# EAGLE board pcb6 (EAGLE 6.4)
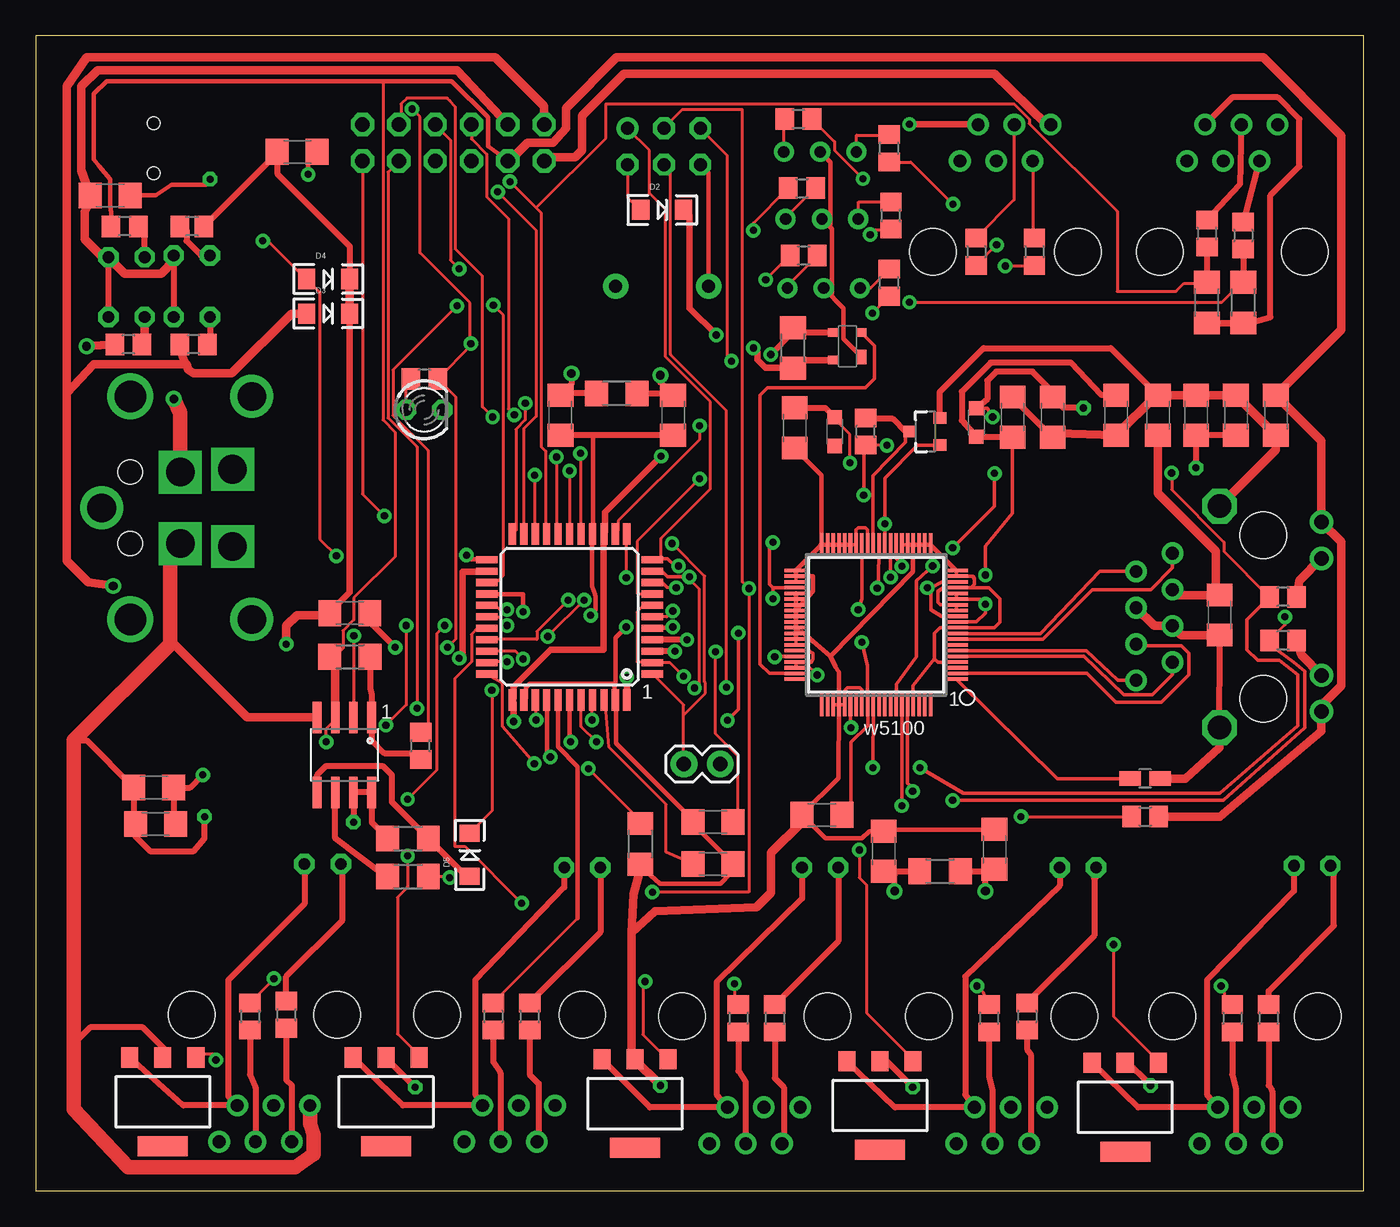
[diagram p0: board, top side]
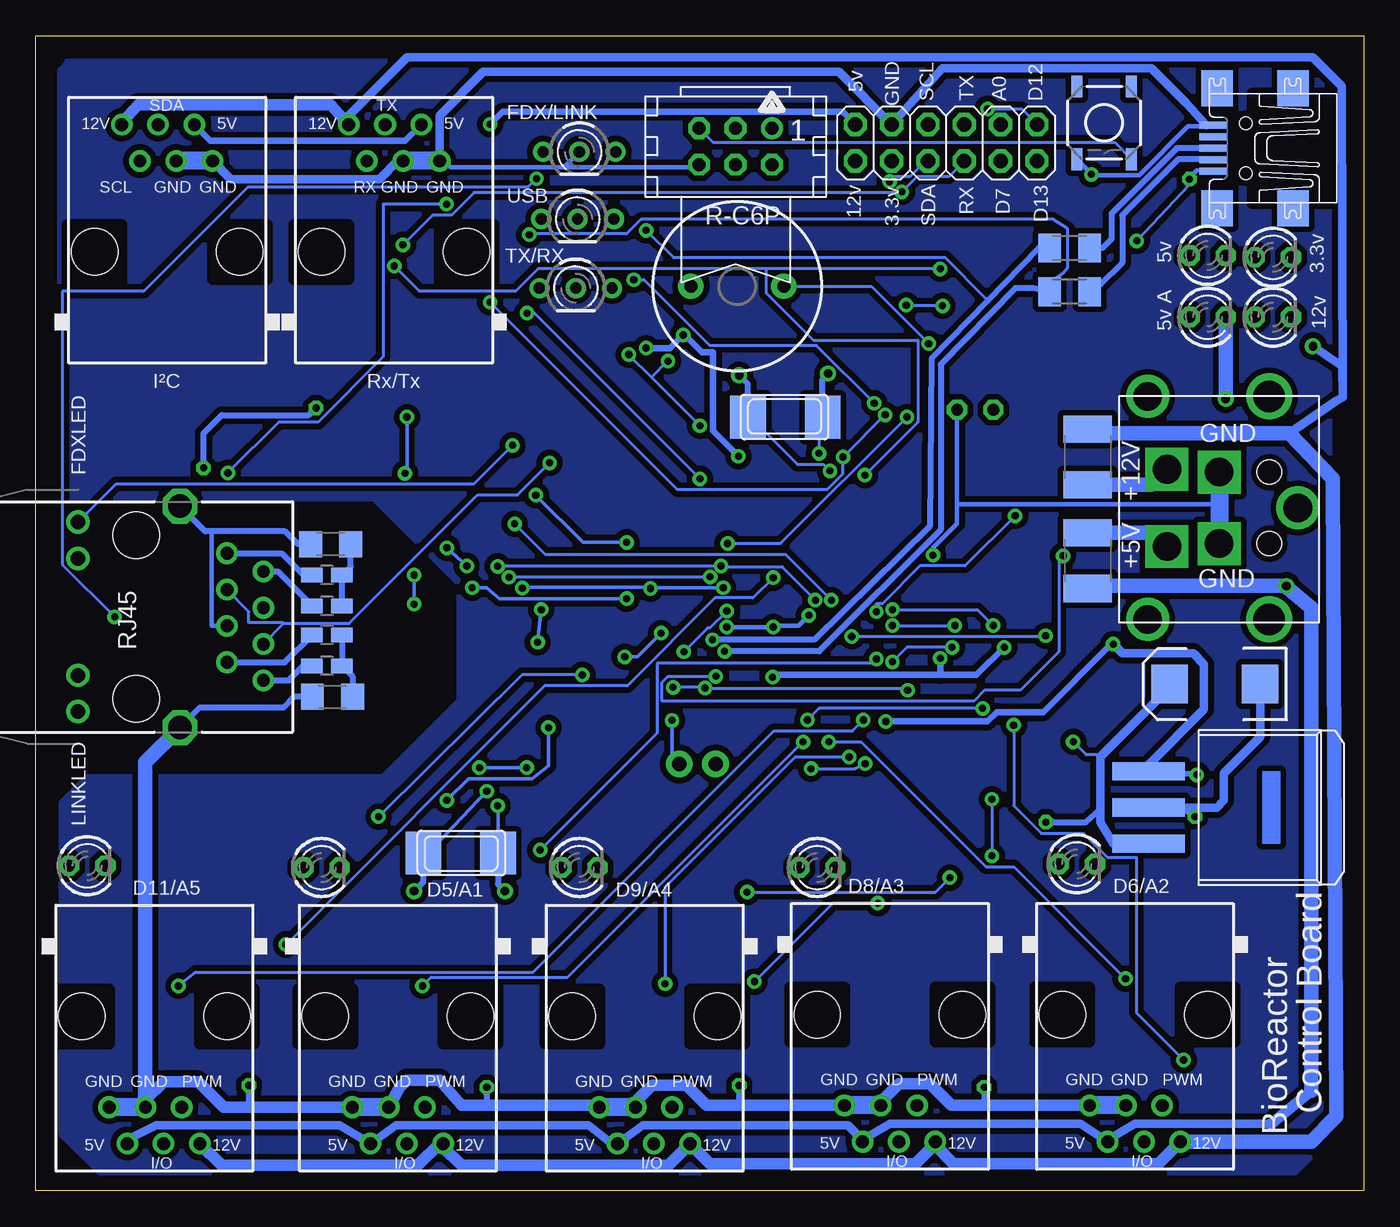
[diagram p1: board, bottom side, seen from below]

Size 92.89 x 80.76 mm. Coordinates in mm from the lower left corner, seen from the top.
Outline: 0,0 92.89,0 92.89,80.76 0,80.76 0,0
Copper layers (1*16): Top 0.035mm / dielectric 1.5mm / Bottom 0.035mm
Design rules "SparkFun": minimum track width 8mil, minimum drill 20mil, track to track 8mil, track to pad 8mil, pad to pad 8mil, via to via 8mil, smd to smd 8mil, copper to edge 10mil, drill to drill 8mil, minimum pad ring 12mil, minimum via ring 10mil, stop-mask expansion 4mil, vias tented up to drill 25mil, thermal gap 10mil
Net classes: 0 default: width 0.203 mm; 1 power: width 0.305 mm; 2 VIN: width 0.305 mm, drill 0.076 mm, clearance 0.025 mm; 3 fine: width 0.305 mm; 4 aref: width 0.254 mm, drill 0.076 mm, clearance 0.076 mm

## Footprints (pad centres in the part's own frame; a part is rotated, then mirrored left to right if it is on the bottom)
C1206 = smd 1.6 x 1.8: 1 -1.4,0; 2 1.4,0
EIA7343 = smd 2.55 x 2.7: A 3.17,0; C -3.17,0
TINYISP = drill 0.914 octagon: GND 2.54,1.27; MOSI 0,1.27; RESET 2.54,-1.27; SCK 0,-1.27; VCC -2.54,1.27 | drill 0.914: MISO -2.54,-1.27
LED-1206 = smd 1.2 x 1.4: A -1.5,0; C 1.5,0
HY931147C = drill 1.63 octagon: GND1 3.05,7.745; GND2 3.05,-7.745 | drill 0.9: P$2 6.35,4.445; P$3 8.89,3.175; P$4 6.35,1.905; P$5 8.89,0.635; P$6 6.35,-0.635; P$7 8.89,-1.905; P$8 6.35,-3.175; P$9 8.89,-4.445 | drill 1.016: P$11 -4.08,6.625; P$12 -4.08,4.085; P$13 -4.08,-4.085; P$14 -4.08,-6.625 | hole 3.25: 0,5.715; 0,-5.715
C1812 = smd 1.9 x 3.4: 1 -1.95,0; 2 1.95,0
BICOLOR-3MM = drill 0.8 pad 1.4: 1 -2.54,0; 2 0,0; 3 2.54,0
RJ12-STRAIGHT-I2C = drill 0.9 pad 1.4: +5V 1.905,8.89; +12V -3.175,8.89; GND1 3.175,6.35; GND2 0.635,6.35; SCL -1.905,6.35; SDA -0.635,8.89 | hole 3.251: -5.08,0; 5.08,0
SOT143-R = smd 1 x 0.7: 1 -0.75,-1 | smd 0.6 x 0.7: 2 0.95,-1; 3 0.95,1; 4 -0.95,1
SQFP80 = smd 1.6 x 0.25: 1 -5.6,3.8; 2 -5.6,3.4; 3 -5.6,3; 4 -5.6,2.6; 5 -5.6,2.2; 6 -5.6,1.8; 7 -5.6,1.4; 8 -5.6,1; 9 -5.6,0.6; 10 -5.6,0.2; 11 -5.6,-0.2; 12 -5.6,-0.6; 13 -5.6,-1; 14 -5.6,-1.4; 15 -5.6,-1.8; 16 -5.6,-2.2; 17 -5.6,-2.6; 18 -5.6,-3; 19 -5.6,-3.4; 20 -5.6,-3.8; 41 5.6,-3.8; 42 5.6,-3.4; 43 5.6,-3; 44 5.6,-2.6; 45 5.6,-2.2; 46 5.6,-1.8; 47 5.6,-1.4; 48 5.6,-1; 49 5.6,-0.6; 50 5.6,-0.2; 51 5.6,0.2; 52 5.6,0.6; 53 5.6,1; 54 5.6,1.4; 55 5.6,1.8; 56 5.6,2.2; 57 5.6,2.6; 58 5.6,3; 59 5.6,3.4; 60 5.6,3.8 | smd 0.25 x 1.6: 21 -3.8,-5.6; 22 -3.4,-5.6; 23 -3,-5.6; 24 -2.6,-5.6; 25 -2.2,-5.6; 26 -1.8,-5.6; 27 -1.4,-5.6; 28 -1,-5.6; 29 -0.6,-5.6; 30 -0.2,-5.6; 31 0.2,-5.6; 32 0.6,-5.6; 33 1,-5.6; 34 1.4,-5.6; 35 1.8,-5.6; 36 2.2,-5.6; 37 2.6,-5.6; 38 3,-5.6; 39 3.4,-5.6; 40 3.8,-5.6; 61 3.8,5.6; 62 3.4,5.6; 63 3,5.6; 64 2.6,5.6; 65 2.2,5.6; 66 1.8,5.6; 67 1.4,5.6; 68 1,5.6; 69 0.6,5.6; 70 0.2,5.6; 71 -0.2,5.6; 72 -0.6,5.6; 73 -1,5.6; 74 -1.4,5.6; 75 -1.8,5.6; 76 -2.2,5.6; 77 -2.6,5.6; 78 -3,5.6; 79 -3.4,5.6; 80 -3.8,5.6
DD-3 = smd 1.27 x 5.08: 1 -2.54,-7.938; 2 0,-7.938; 3 2.54,-7.938
RJ12-STRAIGHT = drill 0.9 pad 1.4: +5V 1.905,8.89; +12V -3.175,8.89; GND1 3.175,6.35; GND2 0.635,6.35; I/O -0.635,8.89; PWM -1.905,6.35 | hole 3.251: -5.08,0; 5.08,0
RJ12-STRAIGHT-RS232 = drill 0.9 pad 1.4: +5V 1.905,8.89; +12V -3.175,8.89; GND1 3.175,6.35; GND2 0.635,6.35; RX -1.905,6.35; TX -0.635,8.89 | hole 3.251: -5.08,0; 5.08,0
1X02 = drill 1.016 pad 1.88: 1 0,0; 2 2.54,0
2X06 = drill 1.016 octagon: 1 -6.35,-1.27; 2 -6.35,1.27; 3 -3.81,-1.27; 4 -3.81,1.27; 5 -1.27,-1.27; 6 -1.27,1.27; 7 1.27,-1.27; 8 1.27,1.27; 9 3.81,-1.27; 10 3.81,1.27; 11 6.35,-1.27; 12 6.35,1.27
L2012C = smd 1 x 1: 1 -1,0; 2 1,0
LED3MM = drill 0.813 octagon: A -1.27,0; K 1.27,0
PG-SOT-223 = smd 1.2 x 1.4: 1 -2.311,-3.099; 2 0,-3.099; 3 2.311,-3.099 | smd 3.5 x 1.4: 4 0,3.099
SOT23-3 = smd 0.8 x 0.9: 1 -0.95,-1; 2 0.95,-1; 3 0,1.1
R0805 = smd 1.3 x 1.5: 1 -0.95,0; 2 0.95,0
R1206 = smd 1.6 x 1.803: 1 -1.422,0; 2 1.422,0
R0805W = smd 1.5 x 1: 1 -1.052,0; 2 1.052,0
M1206 = smd 1.6 x 2: 1 -1.4,0; 2 1.4,0
TACTILE_SWITCH_SMD = smd 1.524 x 0.762: 1 -2.54,1.905; 2 2.54,1.905; 3 -2.54,-1.905; 4 2.54,-1.905
R0805@1 = smd 1.3 x 1.5: 1 -0.85,0; 2 0.85,0
BUZZER-12MM = drill 0.9 pad 1.778: + 3.25,0; - -3.25,0
TQFP44 = smd 1.5 x 0.5: 1 -5.8,4; 2 -5.8,3.2; 3 -5.8,2.4; 4 -5.8,1.6; 5 -5.8,0.8; 6 -5.8,0; 7 -5.8,-0.8; 8 -5.8,-1.6; 9 -5.8,-2.4; 10 -5.8,-3.2; 11 -5.8,-4; 23 5.8,-4; 24 5.8,-3.2; 25 5.8,-2.4; 26 5.8,-1.6; 27 5.8,-0.8; 28 5.8,0; 29 5.8,0.8; 30 5.8,1.6; 31 5.8,2.4; 32 5.8,3.2; 33 5.8,4 | smd 0.5 x 1.5: 12 -4,-5.8; 13 -3.2,-5.8; 14 -2.4,-5.8; 15 -1.6,-5.8; 16 -0.8,-5.8; 17 0,-5.8; 18 0.8,-5.8; 19 1.6,-5.8; 20 2.4,-5.8; 21 3.2,-5.8; 22 4,-5.8; 34 4,5.8; 35 3.2,5.8; 36 2.4,5.8; 37 1.6,5.8; 38 0.8,5.8; 39 0,5.8; 40 -0.8,5.8; 41 -1.6,5.8; 42 -2.4,5.8; 43 -3.2,5.8; 44 -4,5.8
SO08 = smd 0.61 x 2.21: 1 -1.905,-2.616; 2 -0.635,-2.616; 3 0.635,-2.616; 4 1.905,-2.616; 5 1.905,2.616; 6 0.635,2.616; 7 -0.635,2.616; 8 -1.905,2.616
KPJX-4S-S = drill 2 square: +5V 2.7,1.35; +12V -2.7,1.35; GND1 -2.5,5; GND2 2.5,5 | drill 2: P$1 -7.8,0; P$2 7.8,0; P$11 0,10.5 | drill 2.2: P$3 -7.8,8.5; P$4 7.8,8.5 | hole 1.7: -2.5,8.5; 2.5,8.5
NX6035 = smd 2.5 x 3: P$1 2.665,0; P$2 -2.565,0
UX60-MB-5ST = smd 2 x 0.5: 1 2.25,1.6; 2 2.25,0.8; 3 2.25,0; 4 2.25,-0.8; 5 2.25,-1.6 | smd 2.2 x 2.5: M1 -3.3,-4.2; M2 -3.3,4.2; M3 2,4.2; M4 2,-4.2 | hole 0.9: 0,-1.75; 0,1.75

## Placement (x,y rotation side)
C1  100nF  [C1206]  21.97,40.39 0 top
C2  22pF  [C1206]  36.7,54.23 90 top
C3  100nF  [C1206]  47.37,25.78 0 top
C4  100nF  [C1206]  81.15,54.23 270 top
C5  470nF  [C1206]  8.38,25.65 180 top
C6  33uF 10V  [EIA7343]  10.41,35.43 180 bottom
C7  10uF  [C1206]  5.21,69.6 0 top
C8  22pF  [C1206]  44.58,54.23 90 top
C10  10uF 20V  [C1206]  8.26,28.19 180 top
C11  100nF  [C1206]  47.37,22.86 0 top
C12  100nF  [C1206]  18.29,72.64 180 top
C14  100nF  [C1206]  78.49,54.23 90 top
C15  10uF 6.3V A TANT  [C1206]  68.33,54.1 90 top
C22  13pF  [C1206]  67.06,23.88 90 top
C23  100nF  [C1206]  72.14,34.54 180 bottom
C24  100nF  [C1206]  72.26,45.21 180 bottom
C25  100nF  [C1206]  86.74,54.23 270 top
C26  100nF  [C1206]  75.56,54.23 270 top
C31  13pF  [C1206]  59.31,23.75 90 top
C32  10uF 6.3V A TANT  [C1206]  71.12,54.1 270 top
C34  10uF 6.3V A TANT  [C1206]  53.09,53.34 270 top
C35  100nF  [C1206]  83.95,54.23 90 top
C36  100nF  [C1206]  54.99,26.29 180 top
C37  100nF  [C1206]  82.8,40.26 270 top
CON1  SPI  [TINYISP]  43.94,73.03 180 bottom
D2  1N581D1206  [LED-1206]  43.81,68.58 0 top
D3  1N581D1206  [LED-1206]  20.45,61.34 0 top
D4  1N581D1206  [LED-1206]  20.45,63.75 0 top
D5  1N581D1206  [LED-1206]  30.35,23.5 90 top
ETHERNET  none  [HY931147C]  85.85,40.13 0 bottom
F1  0.5A  [C1812]  19.3,51.31 90 bottom
F2  0.5A  [C1812]  19.3,44.07 270 bottom
FDX  BICOLOR-LED  [BICOLOR-3MM]  54.86,72.64 180 bottom
I2C_INT0  I2C  [RJ12-STRAIGHT-I2C]  83.69,65.66 0 bottom
IC1  APX811-44UG-7  [SOT143-R]  56.77,59.05 90 top
IC2  W5100SQFP80  [SQFP80]  58.79,39.57 180 top
IC3  LM3940IS-3.3F  [DD-3]  7.11,26.8 270 bottom
J1  RJ12STRAIGHT  [RJ12-STRAIGHT]  16,12.32 180 bottom
J2  RJ12STRAIGHT  [RJ12-STRAIGHT]  33.15,12.32 180 bottom
J3  RJ12STRAIGHT  [RJ12-STRAIGHT]  50.29,12.19 180 bottom
J4  RJ12STRAIGHT  [RJ12-STRAIGHT]  84.58,12.19 180 bottom
J5  RS232  [RJ12-STRAIGHT-RS232]  67.82,65.66 0 bottom
J7  RJ12STRAIGHT  [RJ12-STRAIGHT]  67.56,12.19 180 bottom
JP4  JP4  [1X02]  47.88,29.85 180 top
JP5  Extansion Port  [2X06]  29.21,73.28 0 bottom
L1  1uH 250mA 0805  [L2012C]  65.79,53.72 90 top
L2  1uH 250mA 0805  [L2012C]  55.88,53.09 90 top
LED2  Blue  [LED3MM]  72.9,22.61 0 bottom
LED3  RED  [LED3MM]  6.35,65.28 0 bottom
LED4  RED  [LED3MM]  10.92,65.41 0 bottom
LED5  Blue  [LED3MM]  20.07,22.86 0 bottom
LED6  Blue  [LED3MM]  38.23,22.61 0 bottom
LED7  BLue  [LED3MM]  54.86,22.61 0 bottom
LED8  Blue  [LED3MM]  89.28,22.73 0 bottom
LED9  RED  [LED3MM]  10.92,61.09 0 bottom
LED10  RED  [LED3MM]  6.35,61.09 0 bottom
LED14  Alert RED  [LED3MM]  27.18,54.61 0 top
Q1  BSP613P  [PG-SOT-223]  59.05,5.97 180 top
Q2  BSP613P  [PG-SOT-223]  8.89,6.22 180 top
Q3  2N7002  [SOT23-3]  62.23,53.09 90 top
Q4  BSP613P  [PG-SOT-223]  24.51,6.22 180 top
Q5  BSP613P  [PG-SOT-223]  41.91,6.1 180 top
Q6  BSP613P  [PG-SOT-223]  76.2,5.84 180 top
R  1k  [R0805]  66.67,12.06 270 top
R1  10k  [R1206]  26.04,24.64 180 top
R2  1k  [R0805]  87.25,41.53 180 top
R3  10k  [R1206]  42.29,24.26 90 top
R4  1k  [R0805]  17.53,12.32 270 top
R5  1k  [R0805]  34.54,12.19 270 top
R6  1k  [R0805]  51.69,12.06 270 top
R7  1k  [R0805]  86.23,12.06 270 top
R8  1K  [R0805]  81.92,66.93 270 top
R9  1K  [R0805]  65.79,65.66 270 top
R10  1K  [R0805]  69.85,65.66 270 top
R11  1K  [R0805]  84.45,66.8 270 top
R12  10K  [R1206]  84.45,62.1 270 top
R13  1M  [R1206]  40.64,55.75 0 top
R14  10K  [R1206]  81.92,62.1 270 top
R15  10k  [R1206]  52.96,58.93 270 top
R16  10k  [R1206]  21.97,37.34 180 top
R17  1k  [R0805]  26.92,31.12 90 top
R18  10k  [R1206]  26.04,21.97 180 top
R19  1k  [R0805]  87.25,38.48 180 top
R20  49.9 1%  [R0805W]  72.52,38.86 180 bottom
R21  49.9 1%  [R0805W]  72.52,36.7 180 bottom
R22  49.9 1%  [R0805W]  72.52,43.05 180 bottom
R23  49.9 1%  [R0805W]  72.52,40.89 180 bottom
R24  22  [M1206]  20.57,65.91 0 bottom
R25  1k  [R0805]  69.34,12.19 270 top
R26  1k  [R0805]  58.04,53.09 90 top
R27  1K  [R0805]  6.22,67.44 180 top
R28  1k  [R0805]  77.6,26.16 0 top
R29  1M  [R1206]  63.25,22.35 180 top
R30  12k3 1%  [R0805W]  77.6,28.83 180 top
R31  22  [M1206]  20.57,62.86 0 bottom
R32  1k  [R0805]  14.99,12.19 270 top
R33  1k  [R0805]  32,12.19 270 top
R34  1k  [R0805]  49.15,12.06 270 top
R35  1k  [R0805]  83.69,12.06 270 top
RESET1  Reset uC  [TACTILE_SWITCH_SMD]  18.16,74.68 270 bottom
RL1  1K  [R0805]  59.82,68.2 90 top
RL2  1K  [R0805]  11.05,59.18 180 top
RL3  1K  [R0805]  6.48,59.18 180 top
RL4  1K  [R0805@1]  10.92,67.44 180 top
RL5  1K  [R0805]  59.69,63.5 90 top
RL6  1K  [R0805]  53.72,65.41 0 top
RL7  1K  [R0805]  53.59,70.1 0 top
RL8  1K  [R0805]  59.69,72.9 90 top
RL9  1K  [R0805]  53.34,74.93 180 top
RL11  1K  [R0805]  27.18,56.77 180 top
SERIAL  BICOLOR-LED  [BICOLOR-3MM]  55.12,63.12 180 bottom
SG1  BUZZERPTH  [BUZZER-12MM]  43.81,63.25 0 bottom
U$4  ATMEGA32U4-AU  [TQFP44]  37.34,40.13 180 top
U$5  SPI_FLASH-X25XXSMD  [SO08]  21.59,30.48 180 top
U$6  KPJX-4S-S  [KPJX-4S-S]  15.11,47.75 270 bottom
USB  BICOLOR-LED  [BICOLOR-3MM]  54.99,67.95 180 bottom
X1  25MHz  [NX6035]  63.12,23.62 180 bottom
X3  16MHz  [NX6035]  40.51,54.1 0 bottom
X4  MINI-USB-UX60-MB-5ST  [UX60-MB-5ST]  8.26,72.9 180 bottom

## Library data of the parts
C1-C5 C7 C8 C10-C12 C14 C15 C22-C26 C31 C32 C34-C37 L1 L2 R R1-R23 R25-R30 R32-R35 RL1-RL3 RL5-RL9 RL11 = rcl
C6 JP4 RESET1 SG1 U$5 = SparkFun
CON1 = lpatiny; OC_FARNELL: unknown; OC_NEWARK: unknown
D2-D5 F1 F2 FDX I2C_INT0 J1-J5 J7 LED2-LED10 LED14 SERIAL U$6 USB X1 X3 = lpatiny
ETHERNET = bioreactor
IC1 = freetronics-master-v1
IC2 = freetronics-marc
IC3 = lpatiny; MF: TEXAS INSTRUMENTS; MPN: REG1117FAKTTT; OC_FARNELL: 1296120; OC_NEWARK: 87H2562
JP5 = pinhead
Q1 Q2 Q4-Q6 = infineon; OC_FARNELL: unknown; OC_NEWARK: unknown
Q3 = freetronics
R24 R31 RL4 = resistor
U$4 = adafruit
X4 = con-hirose; OC_FARNELL: unknown; OC_NEWARK: unknown

## Nets
1V8_OUT: C15.1 C26.1 IC2.11 IC2.15 IC2.16 L1.1
1V8A: C4.2 C32.1 C35.1 IC2.74 L1.2
1V8OUT: C36.1 IC2.33 IC2.69
3.3V: C6.A C25.1 ETHERNET.P$11 ETHERNET.P$14 IC2.12 IC2.18 IC2.44 IC3.3 JP5.3 R1.2 R16.2 R26.1 R27.2 R28.2 U$5.3 U$5.7 U$5.8
3V3A: C14.1 C34.1 C37.1 ETHERNET.P$4 ETHERNET.P$7 IC2.2 L2.2
+5V [fine]: D3.A F2.2 I2C_INT0.+5V J1.+5V J2.+5V J3.+5V J4.+5V J5.+5V J7.+5V JP5.2 R4.2 R5.2 R6.2 R7.2 R12.2 R14.2 R25.2 RL2.2
+5V/1 [fine]: C1.1 C5.1 C10.1 C12.2 D2.C D3.C D4.C IC1.4 IC3.1 R15.2 RL4.1 U$4.14 U$4.34
+12V: F1.2 I2C_INT0.+12V J1.+12V J2.+12V J3.+12V J4.+12V J5.+12V J7.+12V JP5.1 RL3.2
/INT: IC2.56 JP4.1
/RESET: IC1.2 IC2.59
A0: JP5.9 U$4.41
A1: R.1 U$4.40
A2: R32.1 U$4.39
A3: R33.1 U$4.38
A4: R34.1 U$4.37
A5: R35.1 U$4.36
AREF: C11.1 U$4.42
COLLED: IC2.71
CS: R17.2 U$4.25
D2B4: I2C_INT0.SDA R8.1
D2B5: J5.TX R9.1
D5*: Q1.1 U$4.31
D6*: Q2.1 U$4.27
D8*: Q4.1 U$4.28
D9*: Q5.1 U$4.29
D11*: Q6.1 U$4.12
D12*: JP5.11 U$4.26
D13: JP5.12 RL11.1 SG1.+ U$4.32
D+USB: R24.2 X4.3
D-USB: R31.2 X4.2
FDXLED: IC2.70 R2.2 RL8.1
FMOSI: D5.A R1.1 U$5.5
GND [VIN]: C2.1 C3.1 C4.1 C5.2 C6.C C7.1 C8.1 C10.2 C11.2 C12.1 C14.2 C15.2 C22.2 C23.2 C24.2 C25.2 C26.2 C31.2 C32.2 C34.2 C35.2 C36.2 C37.2 CON1.GND ETHERNET.GND1 ETHERNET.GND2 ETHERNET.P$5 ETHERNET.P$6 FDX.2 I2C_INT0.GND1 I2C_INT0.GND2 IC1.1 IC2.4 IC2.10 IC2.13 IC2.14 IC2.17 IC2.19 IC2.20 IC2.21 IC2.22 IC2.23 IC2.24 IC2.25 IC2.26 IC2.32 IC2.34 IC2.35 IC2.36 IC2.37 IC2.38 IC2.39 IC2.40 IC2.41 IC2.42 IC2.43 IC2.45 IC2.46 IC2.47 IC2.48 IC2.49 IC2.50 IC2.51 IC2.52 IC2.53 IC2.54 IC2.63 IC2.64 IC2.65 IC2.68 IC2.77 IC3.2 J1.GND1 J1.GND2 J2.GND1 J2.GND2 J3.GND1 J3.GND2 J4.GND1 J4.GND2 J5.GND1 J5.GND2 J7.GND1 J7.GND2 JP5.4 LED3.K LED4.K LED9.K LED10.K LED14.K Q1.2 Q2.2 Q3.2 Q4.2 Q5.2 Q6.2 R3.1 R30.1 RESET1.4 SERIAL.2 SG1.- U$4.5 U$4.15 U$4.23 U$4.35 U$4.43 U$5.4 U$6.GND1 U$6.GND2 USB.2 X4.5
HWB: R3.2 U$4.33
INT: JP4.2 JP5.10 U$4.1
ISP+5V: CON1.VCC D2.A
LINKLED: IC2.66 R19.2 RL9.1
MISO: CON1.MISO IC2.27 U$4.11 U$5.2
MOSI: CON1.MOSI D5.C IC2.28 U$4.10
N$1: J2.PWM LED6.K Q4.3
N$2: J1.I/O R32.2
N$3 [fine]: C1.2 U$4.24 U$4.44
N$4: LED5.A R4.1
N$5: J3.PWM LED7.K Q5.3
N$6: FDX.3 RL8.2
N$7: J2.I/O R33.2
N$8: RL1.2 USB.3
N$9: C24.1 R22.1 R23.1
N$10: R16.1 R17.1 U$5.1
N$11: FDX.1 RL9.2
N$12: LED4.A RL4.2
N$13: RL5.2 SERIAL.3
N$14: RL7.2 USB.1
N$15: RL6.2 SERIAL.1
N$16: C3.2 U$4.6
N$17: LED2.A R25.1
N$18: J7.I/O R.2
N$19: J4.PWM LED8.K Q6.3
N$20: LED3.A R27.1
N$21: IC2.7
N$22: LED6.A R5.1
N$23: R18.2 U$5.6
N$24: IC2.55 IC2.57 IC2.58 R28.1
N$25: LED14.A RL11.2
N$28: J1.PWM LED5.K Q2.3
N$29: J3.I/O R34.2
N$30: LED7.A R6.1
N$32: J4.I/O R35.2
N$33: LED8.A R7.1
N$34: J7.PWM LED2.K Q1.3
N$38: F2.1 U$6.+5V
N$39: F1.1 U$6.+12V
N$42: C8.2 R13.2 U$4.17 X3.P$2
N$67: ETHERNET.P$12 R2.1
N$70: J5.RX R10.1
N$71: I2C_INT0.SCL R11.1
N$75: LED10.A RL3.1
N$76: LED9.A RL2.1
N$321: C23.1 R20.1 R21.1
N$322: IC2.1 R30.2
N$332: ETHERNET.P$13 R19.1
RD+: R24.1 RL7.1 U$4.4
RD-: R31.1 RL1.1 U$4.3
RESET: CON1.RESET IC1.3 R15.1 RESET1.2 U$4.13
RX: JP5.8 R10.2 U$4.20
RXIN: ETHERNET.P$9 IC2.6 R21.2
RXIP: ETHERNET.P$8 IC2.5 R20.2
RXLED: RL5.1 U$4.8
SCK: CON1.SCK IC2.30 R18.1 U$4.9
SCL: JP5.6 R11.2 R12.1 U$4.18
SDA: JP5.5 R8.2 R14.1 U$4.19
SEN: IC2.31 Q3.3 R26.2
SPDLED: IC2.67
SS: IC2.29 Q3.1 U$4.30
TX: JP5.7 R9.2 U$4.21
TXLED: RL6.1 U$4.22
TXON: ETHERNET.P$3 IC2.9 R23.2
TXOP: ETHERNET.P$2 IC2.8 R22.2
VUSB: C7.2 D4.A U$4.2 U$4.7 X4.1
WRXLED: IC2.72
WTXLED: IC2.73
XTAL1: C2.2 R13.1 U$4.16 X3.P$1
XTLN: C31.1 IC2.75 R29.2 X1.P$2
XTLP: C22.1 IC2.76 R29.1 X1.P$1

## Tracks (layer width: path | path; a pad name or v marks a point on that pad's centre or on a via)
1V8_OUT  (via drill 0.5 pad 0.41)
  Top 0.254: 64.43,41.38 IC2.15 | IC2.15 IC2.16 | v66.42,43.05 66.42,45.09 68.33,47.37 C15.1 | IC2.11 65.81,39.77 66.42,40.39 v66.42,41.02 66.07,41.37 IC2.15
  Top 0.406: C15.1 66.31,52.7 L1.1 64.77,53.86 64.77,55.88 66.8,57.91 72.39,57.91 74.55,55.63 C26.1
  Bottom 0.254: v66.42,41.02 v66.42,43.05
1V8A  (via drill 0.5 pad 0.41)
  Top 0.254: IC2.74 60.2,33.99 60.2,35.43 61.59,37.34 61.59,42.67 v62.74,43.69 | v64.14,44.96 67.06,47.88 v67.06,50.16 | v66.93,54.1 66.56,54.72 L1.2
  Top 0.406: C35.1 C4.2 v81.15,50.55 | L1.2 66.55,55.36 66.55,56.64 67.18,57.28 69.72,57.28 71.12,55.88 C32.1 71.89,54.74 v73.28,54.74
  Bottom 0.254: v62.74,43.69 v64.14,44.96 | v67.06,50.16 66.93,50.29 v66.93,54.1
  Bottom 0.406: v81.15,50.55 81.15,52.96 79.88,54.23 73.79,54.23 v73.28,54.74
1V8OUT  (via drill 0.5 pad 0.41)
  Top 0.254: C36.1 56.9,26.29 57.02,26.42 57.02,31.37 58.19,32.51 58.19,33.95 IC2.69 58.17,36.7 v57.78,38.35 | IC2.33 57.78,41.4 v57.53,40.64
  Bottom 0.254: v57.53,40.64 v57.78,38.35
3.3V  (via drill 0.5, 0.5 pad 0.41)
  Top 0.203: v20.32,31.39 20.32,32.31 20.83,32.82 U$5.3 | v59.54,52.12 58.06,52.12 R26.1 | 24.28,77.6 24.28,53.9 25.15,53.03 25.15,44.35 22.25,41.45 22.25,39.93 21.49,39.17 21.49,37.95 21.03,37.49 R16.2
  Top 0.254: IC2.12 63.33,40.17 62.61,40.64 62.61,42.16 | IC2.18 63.4,42.57 62.61,42.16 | R26.1 57.91,52.01 v57.91,48.64 | v51.56,45.34 51.31,45.09 51.31,42.42 51.55,42.17 | 51.55,42.17 IC2.44 | 62.61,42.16 v62.36,42.16 | v51.56,41.4 51.56,41.78 51.55,41.79 51.55,42.17
  Top 0.305: R27.2 5.27,68.39 5.21,68.83 5.21,70.74 4.45,71.63 4.06,72.14 4.06,76.71 4.95,77.6 24.28,77.6 29.08,77.6 31.62,75.06 31.62,73.03 JP5.3
  Top 0.406: R1.2 23.5,25.76 U$5.8 U$5.7 v22.23,25.78 | R27.2 4.95,67.44
  Top 0.61: JP5.3 33.15,72.01 34.42,73.28 36.2,73.28 37.08,74.3 37.08,75.69 40.64,79.25 85.85,79.25 91.31,73.79 91.31,60.2 C25.1 89.93,52.44 ETHERNET.P$11 91.31,45.38 91.31,35.31 89.93,33.92 ETHERNET.P$14 89.93,32.15 82.8,26.16 R28.2 | U$5.3 20.95,37.19 R16.2
  Bottom 0.203: v20.32,31.39 19.41,30.48 18.69,30.48 18.41,30.35 | v59.54,52.12 62.23,49.43 87.27,49.43 89.92,46.79 ETHERNET.P$11
  Bottom 0.254: v57.91,48.64 54.61,45.34 v51.56,45.34 | v62.36,42.16 61.34,42.16 60.45,41.4 v51.56,41.4
  Bottom 0.406: v22.23,25.78 19.43,25.78 18.41,26.67 | 17.53,24.26 IC3.3
  Bottom 0.61: 17.53,24.26 18.41,25.78 18.41,26.67 18.41,30.35 13.58,35.18 C6.A
3V3A  (via drill 0.5)
  Top 0.203: v56.95,50.9 56.95,52.88 55.93,53.9 L2.2
  Top 0.254: IC2.2 64.41,36.2 73.53,36.2 75.56,34.16 78.74,34.16 80.64,36.07 80.64,37.59 80.14,38.1 76.96,38.1 ETHERNET.P$7
  Top 0.406: C34.1 55.23,54.74 L2.2 55.88,54.36
  Top 0.61: ETHERNET.P$4 79.88,41.66 C37.1 82.55,41.91 82.55,44.7 78.49,48.77 C14.1
  Bottom 0.203: v56.95,50.9 59.18,48.67 61.98,48.67 70.97,39.67 75.54,39.67 | 75.54,39.67 76.96,38.25 ETHERNET.P$7 | ETHERNET.P$4 79.5,42.01 77.98,40.49 77.98,39.73 75.59,39.73 75.54,39.67
+5V  (via drill 0.5, 0.6 pad 0.25)
  Top 0.406: R25.2 69.34,9.91 69.6,9.53 69.6,3.56 J7.+5V | R6.2 51.69,7.87 52.32,7.24 52.32,3.43 J3.+5V | R5.2 34.54,8.13 35.18,7.49 35.18,3.56 J2.+5V | R4.2 17.53,7.75 17.91,7.37 J1.+5V | R12.2 R14.2 84.58,60.58 86.36,61.09 86.36,69.6 88.39,71.63 88.39,74.93 86.87,76.45 83.69,76.45 I2C_INT0.+5V | R7.2 86.23,7.37 86.49,6.98 J4.+5V
  Top 0.457: v61.11,74.57 65.89,74.57 J5.+5V
  Top 0.61: v5.42,42.29 3.68,42.54 2.16,44.07 2.16,55.75 | 2.16,55.75 2.16,77.22 3.56,79.25 32.13,79.25 35.56,75.82 JP5.2 | 10.67,57.4 10.03,58.87 RL2.2 | 10.67,57.4 11.05,57.15 13.72,57.15 17.91,61.34 D3.A | 10.67,57.4 10.54,57.78 4.06,57.78 2.16,55.75
  Bottom 0.457: J5.+5V 67.06,73.41 80.67,73.41 81.79,74.52 I2C_INT0.+5V | v61.11,74.57 60.25,75.44 36.42,75.44 35.56,74.57 JP5.2
  Bottom 0.61: 6.48,4.7 16,4.7 17.91,3.56 | 86.49,3.56 84.45,4.57 71.63,4.57 J7.+5V 67.69,4.57 54.23,4.57 52.58,3.3 | J3.+5V 50.42,4.57 36.07,4.57 35.05,3.56 33.15,4.7 19.81,4.7 J1.+5V
  Bottom 0.813: 3.68,6.98 6.48,4.7 | 86.49,3.56 J4.+5V | 52.58,3.3 J3.+5V | 35.05,3.56 J2.+5V
  Bottom 1.016: F2.2 18.46,42.12 18.29,42.29 v5.42,42.29 5.33,42.16 3.68,40.77 3.68,6.98 | 17.91,3.56 J1.+5V
+5V/1  (via drill 0.5, 0.5 pad 0.41)
  Top 0.406: C5.1 9.65,25.78 C10.1 10.79,28.19 v11.68,29.08 | 16.89,72.55 RL4.1 | 16.89,72.55 16.89,71.12 21.97,66.04 21.97,63.78 D4.C | C12.2 16.89,72.55
  Top 0.457: D3.C 21.95,61.06 21.95,41.86 20.73,40.64 C1.1 | IC1.4 55.73,58.06 52.98,58.06 52.98,57.56 R15.2 52.73,57.56 51.05,57.56 50.49,58.11 50.49,58.62 v50.19,58.93 | v47.6,59.84 45.72,61.72 45.72,68.22 45.36,68.58 D2.C | v43.74,51.36 39.83,47.45 39.83,46.13 U$4.14 39.73,45.92 39.73,37.85 36.02,37.85 33.43,35.25 33.43,34.39 33.38,34.34 U$4.34 33.43,34.14 v33.43,32.82
  Top 0.61: v17.53,38.23 17.53,39.5 18.29,40.26 19.68,40.26 C1.1 | D4.C D3.C
  Bottom 0.406: v11.68,29.08 IC3.1
  Bottom 0.457: v50.19,58.93 48.51,58.93 v47.6,59.84 47.4,59.74 46.28,58.62 45.52,58.62 45.52,53.14 v43.74,51.36 | v33.43,32.82 26.31,32.82 25.65,33.48 22.4,33.48 17.78,38.1 v17.53,38.23
  Bottom 0.61: IC3.1 15.05,29.78 11.18,33.66 11.18,36.83 11.94,37.59 16.89,37.59 v17.53,38.23
+12V  (via drill 0.6 pad 0.25)
  Top 0.61: RL3.2 v3.56,59.05 | JP5.1 35.81,72.26 37.72,72.26 38.23,72.77 38.23,75.18 41.15,78.11 67.06,78.11 70.74,74.55 J5.+12V
  Bottom 0.61: 5.21,52.96 1.91,55.24 1.47,55.49 | 1.47,55.49 1.52,77.22 3.56,79.25 66.93,79.25 70.99,75.18 J5.+12V | v3.56,59.05 1.51,57.65 1.47,55.49
  Bottom 0.813: J1.+12V 14.35,1.91 28.7,1.91 29.97,3.17 J2.+12V 29.97,3.3 31.37,1.91 45.72,1.91 J3.+12V 48.64,1.78 63.12,1.78 64.39,3.05 J7.+12V 64.64,3.3 66.17,1.78 79.88,1.78 J4.+12V | J5.+12V 72.26,75.95 85.72,75.95 86.87,74.68 I2C_INT0.+12V
  Bottom 1.016: F1.2 19,52.96 5.21,52.96 2.16,49.78 1.91,5.21 3.68,3.43 J1.+12V
/INT  (via drill 0.5 pad 0.41)
  Top 0.254: IC2.56 51.73,37.37 v51.69,37.34 | v49.15,38.99 49.15,33.66 v48.39,32.89
  Bottom 0.254: v51.69,37.34 50.8,37.34 v49.15,38.99 | v48.39,32.89 48.39,30.35 JP4.1
/RESET
  Top 0.254: IC1.2 58.67,59.1 58.67,56.77 58.04,56.13 51.18,56.13 50.67,55.63 50.67,36.83 51.33,36.17 IC2.59
A0  (via drill 0.5)
  Top 0.203: v38.91,32.92 38.91,34.29 U$4.41 | v26.67,33.73 26.67,52.02 24.64,54.05 24.64,71.22 25.4,71.98 JP5.9
  Bottom 0.203: v38.91,32.92 38.1,33.73 v26.67,33.73
A1  (via drill 0.5)
  Top 0.203: v39.22,31.39 38.15,32.46 38.15,34.29 U$4.40 | v65.84,14.33 66.29,13.87 R.1
  Bottom 0.203: v39.22,31.39 55.68,14.93 65.23,14.93 v65.84,14.33
A2  (via drill 0.5)
  Top 0.203: v16.66,14.83 14.99,13.16 R32.1 | 37.34,31.45 v37.41,31.39
  Top 0.305: U$4.39 37.34,31.45
  Bottom 0.203: v16.66,14.83 24.49,22.66 26.42,22.66 35.15,31.39 v37.41,31.39
A3
  Top 0.203: 37.9,19.05 32,13.16 R33.1 | 36.52,34.29 U$4.38
  Top 0.305: 37.9,19.05 37.9,29.67 36.52,31.04 36.52,34.29
A4  (via drill 0.5)
  Top 0.203: v48.87,14.48 48.87,13.06 R34.1 | 35.76,30.68 v35.99,30.33 | 35.76,34.29 U$4.37
  Top 0.305: 35.76,34.29 35.76,30.68
  Bottom 0.203: v48.87,14.48 48.87,21.23 39.78,30.33 v35.99,30.33
A5  (via drill 0.5)
  Top 0.203: v35,32.92 35,34.24 34.95,34.29 U$4.36 | v82.91,14.33 83.16,13.82 83.16,13.06 R35.1
  Bottom 0.203: v35,32.92 35.76,32.16 41.25,32.16 58.12,15.29 81.69,15.29 v82.91,14.33
AREF
  Top 0.203: U$4.42 39.78,34.29 39.85,33.96 40.11,31.01 44.09,27.03 44.09,23.67 45.92,22.86 C11.1
CS  (via drill 0.5)
  Top 0.203: v29.46,61.87 24.99,57.4 24.99,54.2 27.43,51.77 27.43,32.61 26.92,32.11 R17.2 | v32,61.92 32.72,61.21 32.72,43.03 32.26,42.57 31.55,42.57 U$4.25
  Bottom 0.203: v29.46,61.87 29.52,61.92 v32,61.92
D2B4
  Top 0.406: I2C_INT0.SDA 84.2,70.36 R8.1
D2B5
  Top 0.203: R9.1 65.79,66.65 68.43,69.29 68.43,74.52 J5.TX
D5*  (via drill 0.5)
  Top 0.203: v57.61,23.83 57.61,21.89 58.12,21.39 58.12,12.45 61.32,9.25 Q1.1 | v34.09,37.19 33.53,37.74 U$4.31
  Bottom 0.203: v57.61,23.83 49.43,32 49.43,36.88 34.39,36.88 v34.09,37.19
D6*  (via drill 0.5)
  Top 0.203: v12.6,9.14 12.6,9.55 11.33,9.55 Q2.1 | v24.49,32.56 25.91,33.98 v25.91,39.52 | v32.97,40.64 32.46,40.64 32.21,40.89 31.55,40.89 U$4.27
  Bottom 0.203: v12.6,9.14 15.9,12.45 15.9,23.32 17.93,23.32 19.61,24.99 22.55,24.99 24.49,26.92 v24.49,32.56 | v25.91,39.52 27.03,40.64 v32.97,40.64
D8*  (via drill 0.5)
  Top 0.203: v26.01,23.42 26.01,21.23 25.3,20.52 25.3,10.97 26.77,9.5 Q4.1 | v26.01,27.38 28.04,29.41 28.04,38.96 v28.6,39.52 | v32.97,39.52 32.36,40.13 U$4.28
  Bottom 0.203: v26.01,27.38 v26.01,23.42 | v32.97,39.52 v28.6,39.52
D9*  (via drill 0.5)
  Top 0.203: v42.62,14.63 42.47,14.48 42.47,10.92 44.04,9.35 Q5.1 | v33.98,20.12 30.02,24.08 29.31,24.08 29.31,35.81 30.48,36.98 30.48,38.91 30.89,39.32 31.5,39.32 U$4.29
  Bottom 0.203: v42.62,14.63 37.13,20.12 v33.98,20.12
D11*  (via drill 0.5)
  Top 0.203: v75.39,17.22 75.39,12.19 78.33,9.25 Q6.1 | v41.3,42.88 41.3,45.92 U$4.12
  Bottom 0.203: v75.39,17.22 57.3,35.31 51.51,35.31 45.36,41.45 42.72,41.45 v41.3,42.88
D12*  (via drill 0.5)
  Top 0.203: v24.38,47.19 22.86,48.72 JP5.11 | 31.55,41.71 U$4.26
  Top 0.305: 31.55,41.71 34.09,41.71 v34.09,40.49
  Bottom 0.203: v34.09,40.49 34.09,41.05 33.68,41.05 31.04,43.69 27.89,43.69 v24.38,47.19
D13  (via drill 0.5)
  Top 0.203: v32.97,36.98 31.55,36.98 U$4.32 | v28.8,38 29.36,38.56 29.36,55.52 28.19,56.69 RL11.1 28.14,56.79 30.43,59.08 v30.43,59.23 30.38,59.28 30.38,62.08 26.87,65.58 26.87,75.08 v26.31,75.64
  Bottom 0.203: v30.43,59.23 34.44,63.25 SG1.+ | v32.97,36.98 31.95,38 v28.8,38 | v26.31,75.64 23.93,75.64 22.86,74.57 JP5.12
D+USB
  Bottom 0.406: X4.3 13.08,72.9 17.65,68.33 17.65,66.55 18.29,65.91 R24.2
D-USB
  Bottom 0.406: X4.2 10.54,72.14 12.95,72.14 16.89,68.2 16.89,64.9 18.41,63.37 R31.2
FDXLED  (via drill 0.5, 0.5 pad 0.41)
  Top 0.203: v79.45,50.19 79.45,49.02 83.11,45.36 83.11,44.7 86.26,41.55 R2.2 | v64.16,68.99 61.21,71.93 RL8.1
  Top 0.254: IC2.70 v58.55,29.59 | v61.85,29.59 64.9,27.81 82.8,27.81 88.27,32.51 88.27,36.07 87,37.08 85.47,37.08 84.71,37.85 84.71,39.94 R2.2
  Bottom 0.203: v79.45,50.19 75.89,53.75 73.15,53.75 68.58,58.32 68.58,68.99 v64.16,68.99
  Bottom 0.254: v58.55,29.59 v61.85,29.59
FMOSI
  Top 0.406: D5.A 30.1,22 R1.1 24.89,27.2 24.89,29.08 24.26,29.72 20.32,29.72 19.68,29.08 U$5.5
GND  (via drill 0.5, 0.5 pad 0.41, 0.6 pad 0.25)
  Top 0.254: C22.2 | IC2.42 IC2.43 | IC2.25 IC2.26 | IC2.35 IC2.34 57.39,46.21 57.53,46.35 58.04,46.35 58.17,46.23 58.17,45.19 IC2.32 | IC2.63 IC2.64 IC2.65 56.59,35 56.77,35.18 57.66,35.18 57.78,35.05 IC2.68 | IC2.4 64.37,36.96 63.12,36.96 62.87,37.21 | 62.87,37.21 62.87,38.99 63.25,39.37 IC2.10 67.06,39.37 67.44,39.75 67.44,41.4 66.67,42.16 IC2.17 64.38,42.16 | IC2.20 IC2.19 64.36,42.98 65.56,42.98 65.66,42.8 65.66,42.42 65.41,42.16 64.38,42.16 | IC2.13 IC2.14 63.29,40.97 63.12,41.15 63.12,41.91 63.5,42.16 64.38,42.16 | IC2.77 61.34,35.31 62.87,37.21 | IC2.53 IC2.54 | 56.16,28.96 56.13,28.85
  Top 0.305: R3.1 42.34,22.66 43.66,21.46 47.88,21.46 48.64,22.23 C11.2 46.1,25.53 C3.1 45.97,25.91 40.59,31.29 40.59,34.19 U$4.43 40.49,34.34 40.49,35.46 | IC2.40 55.02,45.16 55.37,45.16 IC2.39 55.52,45.16 55.78,45.16 IC2.38 55.93,45.16 56.19,45.16 IC2.37 | IC2.37 | IC2.37 56.34,45.16 56.54,45.16 IC2.36 56.74,45.16 56.95,45.16 IC2.35 | IC2.40 54.86,45.11 54.86,45.06 53.29,43.48 IC2.41 53.19,43.33 IC2.42 53.34,42.98 54.36,42.98 54.36,41.91 53.19,40.59 | C34.2 53.09,51.92 54.97,50.04 54.97,45.31 IC2.40 | C22.2 66.95,25.25 59.38,25.25 C31.2 58.3,25.15 57.78,24.64 55.24,24.64 C36.2 53.65,26.37 56.13,28.85 | IC2.53 53.19,38.61 IC2.52 53.29,39.06 53.65,39.04 | 53.65,39.04 53.19,39.12 IC2.51 53.19,39.52 53.19,39.73 IC2.50 53.19,39.88 53.19,40.13 IC2.49 53.19,40.28 53.19,40.44 | 53.65,39.04 55.58,37.36 | 55.58,37.36 55.93,36.63 56.19,36.27 56.19,35.13 IC2.64 56.16,28.96 | 53.19,40.44 53.19,40.54 | 53.19,40.54 IC2.48 53.19,40.44 | 53.19,40.54 53.19,40.59 | 53.19,40.59 53.19,40.95 IC2.47 | 53.19,40.59 IC2.47 | 38.96,52.83 38.96,45.97 U$4.15 38.91,45.77 38.91,42.27 39.12,41.71 39.17,41.53 39.17,40.59 v38.81,40.23 | 40.49,35.46 34.54,35.46 34.29,35.2 34.29,34.44 34.19,34.34 U$4.35 | v44.55,39.42 44.55,39.37 43.18,39.37 U$4.5 | v41.3,39.42 40.54,38.66 40.54,35.56 40.49,35.46 | v30.12,44.45 30.12,44.14 31.5,44.14 U$4.23 | CON1.GND 46.48,71.73 47.04,71.17 47.04,63.25 SG1.- | IC2.25 61.01,45.16 61.37,45.16 IC2.24 | IC2.24 61.52,45.16 61.77,45.16 IC2.23 61.92,45.16 62.18,45.16 IC2.22 62.33,45.16 62.53,45.16 IC2.21 62.69,45.06 64.36,43.38 IC2.20 | v19.05,71.07 19.05,72.03 19.66,72.64 C12.1
  Top 0.305: IC1.1 57.76,58.32 56.49,59.59 56.49,61.72 55.12,63.09 SERIAL.2 55.68,62.74 55.68,67.26 USB.2 55.58,67.56 55.58,71.93 FDX.2 | 41.68,9.63 Q5.2 | 55.58,37.36 61.37,43.28 61.37,45.01 IC2.24 | IC2.47 IC2.46 IC2.45
  Top 0.406: ETHERNET.GND2 82.8,38.1 C37.2 | C8.1 38.96,52.83 C2.1 | 2.67,31.5 3.55,31.5 C10.2 6.86,25.78 C5.2 6.98,24.77 8,23.75 11.05,23.75 11.81,24.64 v11.81,26.16 | Q4.2 24.51,9.27 v26.54,7.24 | Q2.2 9.02,9.91 7.49,11.43 3.81,11.43 2.67,10.29 | Q5.2 41.78,9.27 | Q1.2 59.38,9.2 v61.34,7.24 | Q6.2 76.15,9.2 v77.98,7.37 | C32.2 C15.2 C32.2 | C32.2 71.12,52.83 | LED4.K LED9.K | LED3.K LED10.K | Q3.2 63.23,55.86 66.29,58.93 75.19,58.93 C14.2
  Top 0.61: JP5.4 29.46,78.36 4.32,78.36 3.17,77.22 3.17,71.37 C7.1 3.81,69.47 3.94,69.22 3.81,69.22 3.43,68.45 3.43,66.55 4.7,65.28 LED3.K 6.22,64.14 8.76,64.14 9.65,65.02 LED4.K | C32.2 71.37,52.96 C26.2 78.36,55.63 C14.2 C4.1 C35.2 C25.2 86.74,51.82 ETHERNET.GND1 | 41.78,9.27 v43.69,7.37 | ETHERNET.GND2 82.8,30.99 80.39,28.83 R30.1 | C37.2 80.14,38.86 ETHERNET.P$6 78.23,39.5 ETHERNET.P$5 | U$5.4 14.78,33.1 9.4,38.48 | 42.34,22.66 41.81,20.73 41.68,18.06 | 41.68,9.63 41.68,18.06 | C36.2 53.59,25.78 51.44,23.62 51.44,20.83 50.42,19.81 43.31,19.56 41.68,18.06
  Top 1.016: v9.65,55.37 10.11,54.4 U$6.GND1 | U$6.GND2 9.4,44.54 9.4,38.48 9.4,38.23 2.67,31.5 2.67,10.29 2.67,5.71 6.48,1.65 18.16,1.65 19.43,2.54 19.43,3.94 19.18,4.7 J1.GND1
  Bottom 0.305: v44.55,39.42 v41.3,39.42 41.2,39.52 39.52,39.52 v38.81,40.23 | v30.12,44.45 30.12,44.96 28.45,46.63 28.45,48.01 | LED14.K 28.45,48.01 | 19.02,71.09 18.95,71.02 15.7,71.02 12.29,74.42 10.62,74.42 X4.5 | 19.02,71.09 RESET1.4 | v19.05,71.07 19.02,71.09 | FDX.2 55.83,71.68 | 55.83,71.68 55.93,71.58 63.86,71.58 64.06,71.78 J5.GND1 | 80.57,46.1 80.57,39.52 79.5,39.52 ETHERNET.P$6 | CON1.GND 46.48,71.73 46.63,71.58 55.73,71.58 55.83,71.68 | 10.11,48.01 28.45,48.01
  Bottom 0.406: v11.81,26.16 12.76,26.8 IC3.2 | v26.54,7.24 26.54,6.35 26.92,5.97 | v43.69,7.37 43.69,6.1 43.81,5.97 | v61.34,7.24 61.34,6.1 61.47,5.97 | v77.98,7.37 77.98,5.84 | C24.2 74.55,45.21 75.44,46.1 80.57,46.1 81.03,46.1 ETHERNET.GND1 | C23.2 74.8,34.54 75.56,33.78 81.41,33.78 ETHERNET.GND2 | X4.5 11,74.5
  Bottom 0.61: J5.GND1 64.64,75.18 61.59,78.23 36.7,78.23 JP5.4 29.46,78.49 14.86,78.49 12.41,76.04 11.05,74.55 11,74.5 | J5.GND2 67.56,72.01 68.83,70.74 79.25,70.74 I2C_INT0.GND1 | C6.C 7.24,31.75 9.78,29.21 9.78,27.3 10.29,26.8 IC3.2
  Bottom 0.813: J1.GND1 26.92,5.97 28.83,5.97 30.35,7.49 32.51,7.49 33.78,6.22 J2.GND2 | J2.GND1 43.81,5.97 45.97,5.97 47.37,7.37 49.78,7.37 50.93,6.22 J3.GND2 | J3.GND1 53.59,5.97 61.47,5.97 63.12,5.97 64.64,7.75 66.93,7.75 67.44,7.24 J7.GND2 | J7.GND1 77.98,5.84 79.76,5.84 81.53,7.62 83.95,7.62 85.22,6.35 J4.GND2
  Bottom 1.016: LED9.K v9.65,55.37 | ETHERNET.GND2 85.22,29.97 85.22,6.35
  Bottom 1.27: U$6.GND1 10.11,48.01 U$6.GND2 | J1.GND2 J1.GND1 | J4.GND2 J4.GND1 | J7.GND2 J7.GND1 | J3.GND2 J3.GND1 | J2.GND2 J2.GND1 | J5.GND1 J5.GND2 | I2C_INT0.GND1 I2C_INT0.GND2
HWB  (via drill 0.5)
  Top 0.203: v34.87,29.87 32.66,32.46 32.66,35.48 31.55,36.12 U$4.33 | v38.66,29.52 42.27,25.91 42.27,25.71 R3.2
  Bottom 0.203: v34.87,29.87 35.61,29.52 v38.66,29.52
INT  (via drill 0.5)
  Top 0.203: 45.31,33.32 45.31,29.87 JP4.2 | 45.31,33.32 45.31,33.98 43.18,36.12 U$4.1 | v31.95,54.1 31.24,54.81 31.24,63.96 29.36,65.84 29.36,75.77 28.96,76.23 28.78,76.4 25.96,76.4 25.55,76 25.55,74.73 25.4,74.57 JP5.10 | v44.5,45.26 46.79,42.98 46.79,35.56 46.84,35.51 46.84,34.8 45.36,33.32 45.31,33.32
  Bottom 0.203: v31.95,54.1 40.79,45.26 v44.5,45.26
ISP+5V
  Top 0.203: CON1.VCC 41.4,69.44 42.27,68.58 D2.A
LINKLED  (via drill 0.5, 0.5 pad 0.41)
  Top 0.203: v87.38,40.13 87.38,39.57 86.31,38.51 R19.2 | v57.86,70.76 55.88,72.75 55.88,73.36 54.3,74.93 RL9.1
  Top 0.254: IC2.66 56.99,32.55 v57.02,32.38 | v64.14,27.3 83.06,27.3 88.77,32.38 88.77,36.32 88.01,36.96 86.93,37.72 R19.2
  Bottom 0.203: v87.38,40.13 91.03,43.79 91.03,62.89 85.34,62.89 78.08,70.16 58.47,70.16 v57.86,70.76
  Bottom 0.254: v57.02,32.38 57.02,29.72 58.17,28.83 62.61,28.83 v64.14,27.3
MISO  (via drill 0.5)
  Top 0.203: v22.25,38.81 22.25,33.12 U$5.2 | v38.35,41.3 v35.81,38.76 | CON1.MISO 41.4,74.27 42.93,72.75 42.93,69.75 44.04,68.63 44.04,58.32 47.19,55.17 47.19,49.07 43.74,45.62 43.74,44.3 U$4.11
  Top 0.254: U$4.11 43.56,44.2 44.2,44.2 44.7,43.69 v44.96,43.69 | v60.58,43.66 60.45,43.94 60.2,44.2 IC2.27
  Bottom 0.203: v22.25,38.81 22.3,38.76 v35.81,38.76 | v38.35,41.3 40.69,43.64 44.86,43.64 v44.96,43.69
  Bottom 0.254: v44.96,43.69 v60.58,43.66
MOSI  (via drill 0.5)
  Top 0.203: v31.9,35 31.9,26.57 30.38,25.04 D5.C | v46.08,35.15 46.38,35.46 46.38,42.11 45.67,42.82 v45.72,42.93 | v48.31,35.2 48.31,54.56 44.4,58.47 44.4,71.27 43.94,71.73 CON1.MOSI
  Top 0.254: IC2.28 59.79,45.05 v59.79,42.9 | v45.72,42.93 44.2,42.93 43.81,43.31 U$4.10
  Bottom 0.203: v31.9,35 32.05,35.15 v46.08,35.15 46.13,35.2 v48.31,35.2
  Bottom 0.254: v59.79,42.9 v45.72,42.93
N$1
  Top 0.406: Q4.3 25.68,5.97 J2.PWM 30.73,6.73 30.73,14.73 36.96,21.21 LED6.K
N$2
  Top 0.406: R32.2 14.99,8.13 15.37,7.24 J1.I/O
N$3  (via drill 0.5)
  Top 0.457: v41.35,35.92 U$4.44 | v25.15,38 23.42,39.73 23.42,40.39 C1.2 | v29.62,37.24 29.87,37.49 29.87,43.28 31.5,43.28 U$4.24
  Bottom 0.457: v41.35,35.92 41.2,36.07 29.62,36.07 | 29.62,36.07 27.08,36.07 v25.15,38 | 29.62,36.07 v29.62,37.24
N$4
  Top 0.406: R4.1 17.53,14.99 21.46,18.92 21.46,22.73 LED5.A
N$5
  Top 0.406: Q5.3 42.95,5.84 J3.PWM 47.62,6.73 47.62,14.61 53.59,20.45 LED7.K
N$6
  Top 0.203: FDX.3 57.4,73.81 59.69,73.81 RL8.2
N$7
  Top 0.406: R33.2 32,9.02 32.51,8.25 J2.I/O
N$8
  Top 0.203: RL1.2 59.79,69.14 57.56,69.14 57.56,67.97 USB.3
N$9
  Bottom 0.406: C24.1 70.86,43.66 R22.1 R23.1
N$10
  Top 0.406: R16.1 23.39,35.15 23.5,34.67 U$5.1 23.5,31.5 24.38,30.61 26.48,30.61 R17.1
N$11
  Top 0.203: FDX.1 52.32,74.88 52.38,74.93 RL9.2
N$12
  Top 0.406: RL4.2 10.29,67.44 10.54,67.18 10.54,66.42 11.56,65.41 LED4.A
N$13
  Top 0.203: RL5.2 59.69,64.41 58.42,63.14 57.66,63.14 SERIAL.3
N$14
  Top 0.203: RL7.2 54.51,70.1 52.48,68.07 52.48,67.97 USB.1
N$15
  Top 0.203: SERIAL.1 52.58,63.3 54.66,65.38 RL6.2
N$16  (via drill 0.5)
  Top 0.203: U$4.6 44.15,40.13 v44.55,40.54 | v47.55,37.69 47.55,31.95 49.12,30.38 49.12,26.11 48.82,25.81 C3.2
  Bottom 0.203: v44.55,40.54 45.72,39.37 45.87,39.37 v47.55,37.69
N$17
  Top 0.406: LED2.A 74.17,21.97 74.04,21.84 74.04,17.84 R25.1
N$18
  Top 0.406: R.2 66.67,8 66.93,6.98 J7.I/O
N$19
  Top 0.406: Q6.3 77.11,5.84 J4.PWM 81.92,6.73 81.92,14.73 88.01,20.96 LED8.K
N$20
  Top 0.406: LED3.A 7.62,67.44 R27.1
N$22
  Top 0.406: LED6.A 39.5,18.1 R5.1
N$23
  Top 0.406: R18.2 24.51,21.97 20.95,24.64 U$5.6
N$24  (via drill 0.5)
  Top 0.203: v68.91,26.16 R28.1 | v54.66,36.07 53.8,36.93 53.19,36.93 IC2.57
  Top 0.254: IC2.58 IC2.57 54.25,36.97 54.36,37.21 54.36,37.59 54.05,37.77 53.16,37.77 IC2.55
  Bottom 0.203: v68.91,26.16 58.88,36.07 v54.66,36.07
N$25
  Top 0.203: LED14.A 25.91,56.44 26.21,56.74 RL11.2
N$26
  pour Bottom (isolate 0.406): 90.68,78.99 3.56,78.99 2.41,77.85 2.41,3.68 4.83,1.27 88.39,1.27 91.06,3.94 91.06,27.18 89.28,28.96 68.58,28.96 63.25,34.29 63.25,42.42 69.22,48.39 90.42,48.39 91.19,49.15 91.19,78.36 90.68,78.87
N$28
  Top 0.406: LED5.K 18.8,20.07 13.46,14.73 13.46,6.6 J1.PWM 10.31,5.97 Q2.3
N$29
  Top 0.406: R34.2 49.15,8.38 49.66,7.62 J3.I/O
N$30
  Top 0.406: LED7.A 56.13,17.46 R6.1
N$32
  Top 0.406: R35.2 83.69,8.13 83.95,7.11 J4.I/O
N$33
  Top 0.406: R7.1 86.23,13.97 90.81,18.54 90.81,22.48 LED8.A
N$34
  Top 0.406: Q1.3 60.1,5.84 J7.PWM 65.02,6.73 65.02,14.99 71.63,21.34 LED2.K
N$38
  Bottom 1.016: U$6.+5V 14.73,46.02 F2.1
N$39
  Bottom 1.016: U$6.+12V 14.86,49.36 F1.1
N$42  (via drill 0.5, 0.6 pad 0.25)
  Top 0.203: v37.34,50.34 U$4.17
  Top 0.406: R13.2 44.45,55.75 C8.2 43.69,56.52 v43.69,57.02
  Bottom 0.203: v37.34,50.34 37.8,50.8 39.62,50.8 42.88,54.05 X3.P$2
  Bottom 0.406: X3.P$2 43.08,56.41 v43.69,57.02
N$67
  Top 0.61: R2.1 88.39,42.67 ETHERNET.P$12
N$70
  Top 0.203: R10.1 69.85,66.65 69.75,66.75 69.75,71.98 J5.RX
N$71
  Top 0.406: I2C_INT0.SCL R11.1
N$75
  Top 0.61: LED10.A 7.62,59.38 RL3.1
N$76
  Top 0.406: LED9.A 12.19,59.38 RL2.1
N$321
  Bottom 0.406: C23.1 70.74,35.97 R21.1 R20.1
N$322
  Top 0.254: R30.2 71.46,28.83 IC2.1
N$332
  Top 0.61: R19.1 88.51,37.46 ETHERNET.P$13
RD+  (via drill 0.5, 0.5 pad 0.25)
  Top 0.203: v50.19,67.16 50.19,67.67 52.63,70.1 RL7.1
  Top 0.406: v45.55,38.53 U$4.4
  Bottom 0.203: v50.19,67.16 48.26,65.23 29.26,65.23 26.42,62.38 26.28,62.25
  Bottom 0.406: R24.1 22.73,65.91 26.28,62.25 30.23,58.17 30.35,46.48 38.43,38.53 v45.55,38.53
RD-  (via drill 0.5, 0.5 pad 0.25)
  Top 0.203: v58.37,66.85 58.37,67.21 59.79,67.21 RL1.1
  Top 0.406: v44.7,37.72 v44.69,37.73 U$4.3
  Bottom 0.203: v58.37,66.85 58.32,66.9 51.56,66.9 50.55,67.92 21.74,67.92 20.7,67.26 20.7,64.57 21.08,64.14 21.77,63.68 R31.1
  Bottom 0.406: R31.1 23.12,63.12 24.38,63.12 29.59,57.78 29.59,46.23 38.1,37.72 v44.7,37.72
RESET  (via drill 0.5)
  Top 0.203: 52.98,60.05 52.98,60.3 R15.1 52.93,59.99 | 55.73,60.05 IC1.3 | v46.43,53.49 46.43,52.53 40.74,46.84 40.74,46.18 40.54,45.97 U$4.13 | v48.67,58.01 48.36,58.32 48.36,72.39 46.48,74.27 CON1.RESET
  Top 0.406: 52.98,60.05 55.73,60.05 | 52.93,59.99 v51.41,58.47
  Bottom 0.203: v51.41,58.47 49.84,56.9 | 49.84,56.9 v46.43,53.49 | RESET1.2 17.42,73.3 45.52,73.3 46.48,74.27 CON1.RESET | 49.84,56.9 48.72,58.01 v48.67,58.01
RX  (via drill 0.5)
  Top 0.203: v34.9,50.04 34.9,45.97 U$4.20 | v29.62,64.47 29.01,65.08 29.01,73.46 27.94,74.52 JP5.8 | v67.82,64.67 69.85,64.67 R10.2
  Bottom 0.203: v34.9,50.04 31.19,53.75 31.19,59.49 38.51,59.49 41.81,62.79 41.81,64.47 | v29.62,64.47 41.81,64.47 | v67.82,64.67 66.04,62.89 59.33,62.89 57.76,64.47 41.81,64.47
RXIN
  Top 0.254: IC2.6 64.75,37.77 73.48,37.77 75.69,35.69 ETHERNET.P$9
  Bottom 0.406: ETHERNET.P$9 75.18,35.69 74.17,36.7 R21.2
RXIP
  Top 0.254: IC2.5 64.82,37.36 73.3,37.36 76.1,34.67 78.11,34.67 79.5,36.07 ETHERNET.P$8
  Bottom 0.406: ETHERNET.P$8 75.47,36.96 R20.2
RXLED  (via drill 0.5)
  Top 0.203: v46.43,49.78 42.06,45.41 42.06,41.76 43.13,41.76 U$4.8 | v58.52,61.37 59.69,62.53 RL5.1
  Bottom 0.203: v46.43,49.78 58.01,61.37 v58.52,61.37
SCK  (via drill 0.5)
  Top 0.203: v28.96,21.89 28.96,21.95 27.48,21.95 R18.1 | v43.13,20.88 49.89,20.88 v49.89,42.11 49.43,42.57 49.43,75.59 45.21,75.59 43.94,74.32 CON1.SCK
  Top 0.254: IC2.30 58.93,42.42 arc54 v58.85,42.14 | v44.81,42.16 44.15,42.21 43.81,42.54 U$4.9
  Bottom 0.203: v28.96,21.89 29.97,20.88 v43.13,20.88 | v49.89,42.11 49.89,42.21
  Bottom 0.254: v58.85,42.14 arc-49 58.55,42.21 49.89,42.21 49.66,42.16 | 49.78,42.16 49.66,42.16 | 49.66,42.16 v44.81,42.16
SCL  (via drill 0.5)
  Top 0.203: v36.42,51.31 36.42,46.08 36.52,45.97 U$4.18 | v33.48,54.25 33.07,54.66 33.07,67.97 31.55,69.49 31.55,72.49 30.48,73.56 JP5.6 | v61.11,62.13 82.96,62.13 84.28,63.45 R12.1
  Top 0.406: R11.2 R12.1
  Bottom 0.203: v33.48,54.25 v36.42,51.31 36.47,51.26 36.47,50.09 37.54,49.02 48.01,49.02 v61.11,62.13
SDA  (via drill 0.5)
  Top 0.203: v33.17,70.56 35,68.73 | 35,68.73 35.36,68.38 35.36,52.02 35.66,51.71 35.66,46.02 35.71,45.97 U$4.19 | 35,68.73 39.88,73.61 39.88,76 68.43,76 69.49,74.93 69.49,74.62 75.64,68.48 75.64,62.89 79.76,62.89 80.31,63.45 81.74,63.45 R14.1
  Top 0.406: R8.2 R14.1
  Bottom 0.203: v33.17,70.56 32.82,70.92 31.75,70.92 30.68,71.98 30.48,71.98 JP5.5
SEN
  Top 0.254: 60.83,53.09 60.83,52.32 58.57,50.01 58.57,45.47 IC2.31
  Top 0.406: Q3.3 60.83,53.09 59.94,53.97 58.61,53.97 R26.2
SS  (via drill 0.5)
  Top 0.203: v37.24,41.3 35.05,39.12 35.05,38.56 31.55,38.56 U$4.30 | v59.38,46.63 v59.39,46.63
  Top 0.254: Q3.1 61.66,52.14 59.41,49.84 v59.39,46.63 59.38,45.34 IC2.29
  Bottom 0.203: v37.24,41.3 40.44,44.5 57.25,44.5 v59.38,46.63
TX  (via drill 0.5)
  Top 0.203: v32.31,69.85 35,67.16 35,54.15 34.14,53.29 34.14,45.97 U$4.21 | v67.21,66.14 65.79,64.72 R9.2
  Bottom 0.203: JP5.7 27.94,71.98 29.01,70.92 31.24,70.92 v32.31,69.85 32.36,69.8 62.23,69.8 63.8,68.22 65.13,68.22 v67.21,66.14
TXLED  (via drill 0.5)
  Top 0.203: v34.24,55.07 34.24,53.9 33.58,53.24 33.58,46.18 33.38,45.97 U$4.22 | v51.05,63.7 52.73,65.38 RL6.1
  Bottom 0.203: v34.24,55.07 38.3,59.13 45.77,59.13 50.34,63.7 v51.05,63.7
TXON
  Top 0.254: IC2.9 64.38,38.96 70.26,38.96 74.42,43.31 ETHERNET.P$3
  Bottom 0.406: ETHERNET.P$3 75.98,43.31 R23.2
TXOP
  Top 0.254: IC2.8 64.5,38.56 70.46,38.56 73.91,42.04 77.98,42.04 79.5,43.56 ETHERNET.P$2
  Bottom 0.406: ETHERNET.P$2 75.69,44.58 74.04,42.93 73.7,42.93 R22.2
VUSB  (via drill 0.5, 0.5 pad 0.41)
  Top 0.203: U$4.7 43.13,40.89 42.47,40.89 42.06,40.49 42.06,36.98 43.13,36.98 U$4.2 43.23,36.93 44.35,36.93 v45.31,35.97 | v15.88,66.42 16.1,66.55 18.9,63.75 D4.A 19,63.7 19.86,62.84 19.86,45.57 v21.03,44.4
  Top 0.305: v12.19,70.74 11.94,70.36 9.53,70.36 8.38,69.6 C7.2
  Bottom 0.203: v15.88,66.42 12.24,70.31 12.24,70.61 v12.19,70.74 | v45.31,35.97 48.67,35.97 49.07,35.56 49.07,34.24 27.28,34.24 26.52,35 24.03,35 21.34,37.69 21.34,44.4 v21.03,44.4
  Bottom 0.305: X4.1 10.41,71.33 11.68,71.37 12.19,70.87 v12.19,70.74
XTAL1  (via drill 0.5, 0.6 pad 0.25)
  Top 0.203: v38.1,51.56 38.1,45.97 U$4.16
  Top 0.406: R13.1 36.83,55.75 C2.2 37.47,56.39 v37.47,57.15
  Bottom 0.203: v38.1,51.56 38.1,53.95 37.95,53.95 X3.P$1
  Bottom 0.406: X3.P$1 37.85,54.23 37.85,56.77 v37.47,57.15
XTLN  (via drill 0.5 pad 0.41, 0.6 pad 0.25)
  Top 0.254: IC2.75 v60.58,26.92
  Top 0.406: C31.1 59.82,22.35 | 59.82,22.35 R29.2 | v60.07,20.96 60.07,22.1 59.82,22.35
  Bottom 0.254: v60.58,26.92 60.55,26.9 X1.P$2
  Bottom 0.406: X1.P$2 60.55,21.44 v60.07,20.96
XTLP  (via drill 0.5 pad 0.41, 0.6 pad 0.25)
  Top 0.254: IC2.76 60.98,33.82 60.98,28.5 61.34,28.07 v61.34,27.94
  Top 0.406: R29.1 66.93,22.35 C22.1 66.42,21.84 v66.42,20.96
  Bottom 0.254: v61.34,27.94 65.41,23.62 X1.P$1
  Bottom 0.406: X1.P$1 65.78,21.59 v66.42,20.96

## Text on the board
tNames: 1 | 1 | 1 | w5100
bNames: GND | 5v | D12 | A0 | TX | SCL | FDX/LINK | D13 | D7 | RX | SDA | 3.3v | 12v | USB | 3.3v | 5v | TX/RX | 5v A | 12v | Rx/Tx | I²C | FDXLED | LINKLED | Control Board | D6/A2 | D8/A3 | D9/A4 | D5/A1 | D11/A5 | BioReactor